# EAGLE board design (EAGLE 7.6.0)
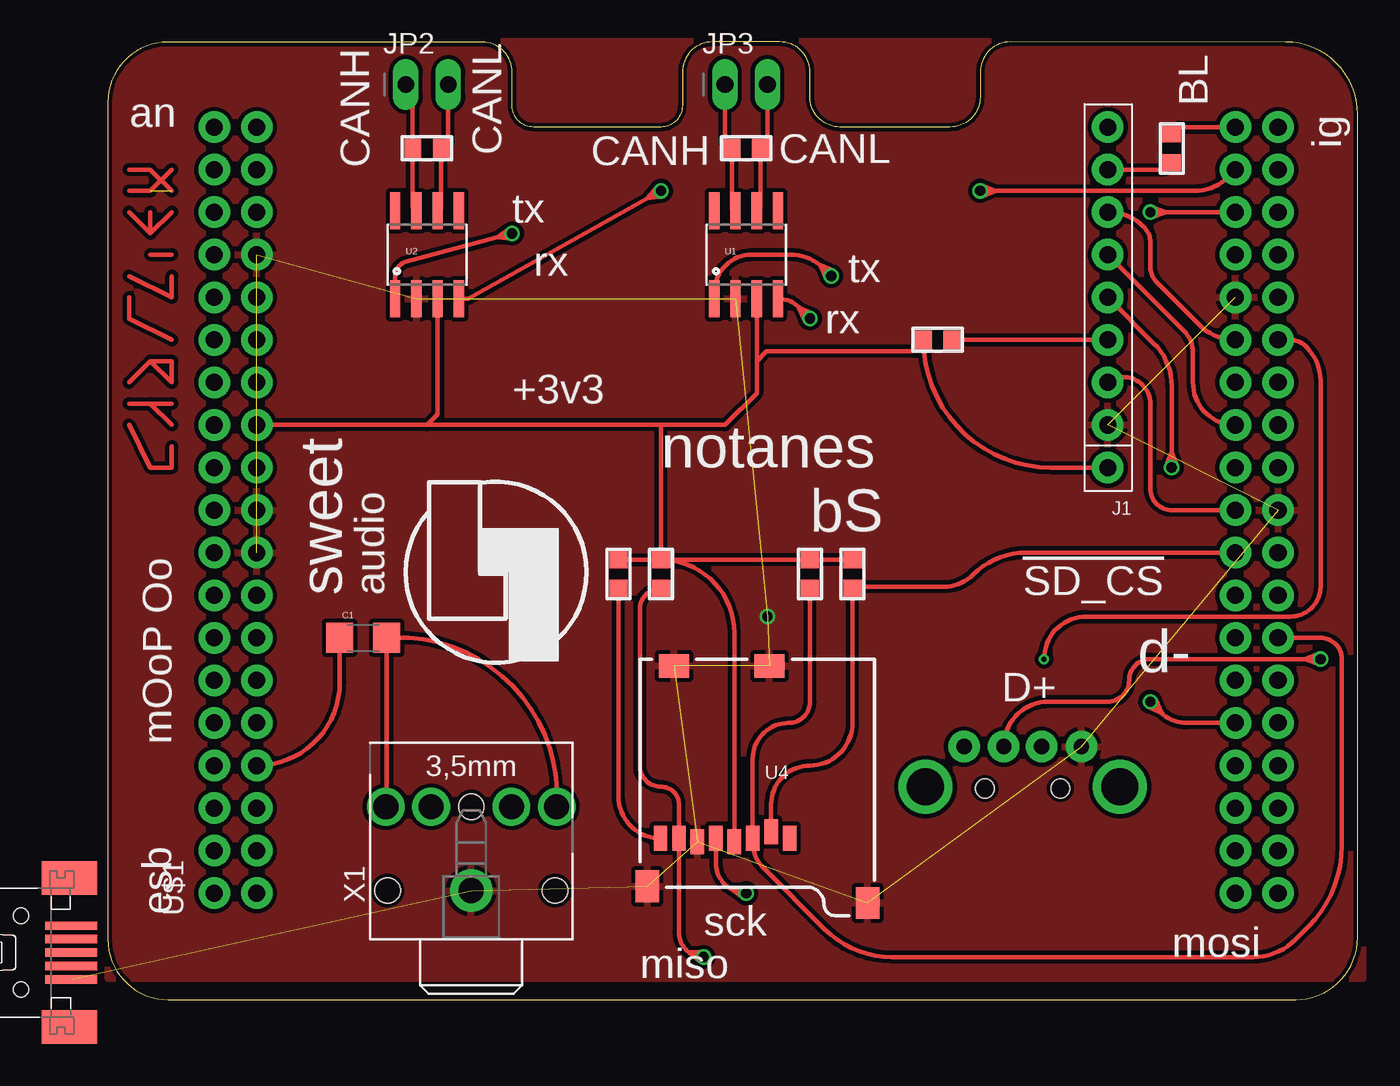
[diagram p0: board, top side]
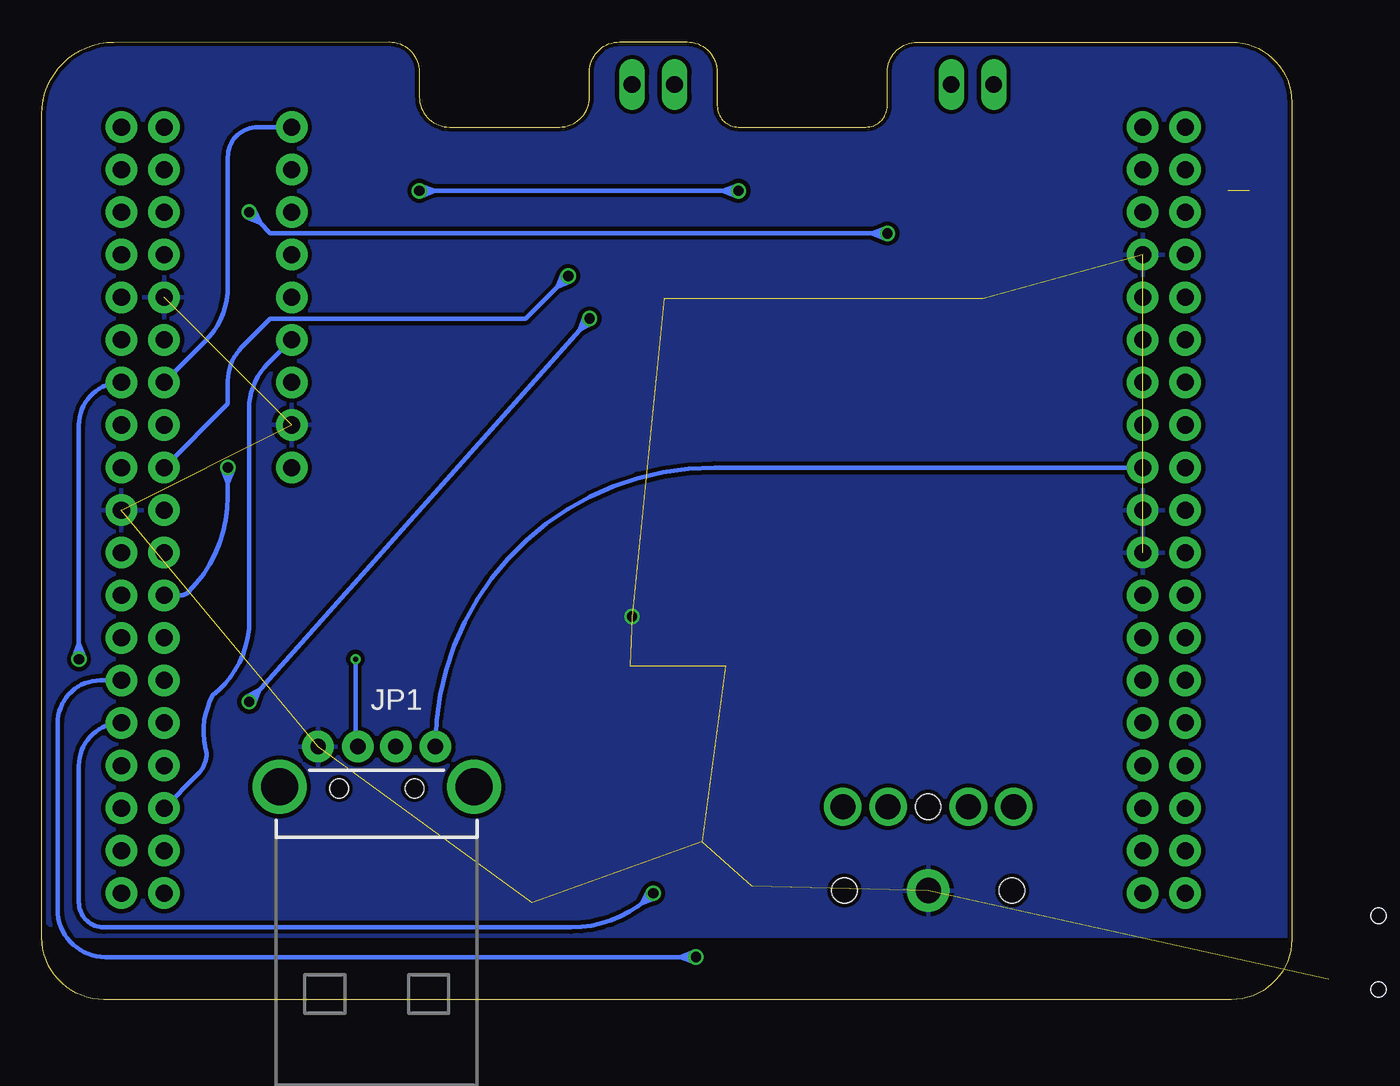
[diagram p1: board, bottom side, seen from below]

Size 74.6 x 57.15 mm. Coordinates in mm from the lower left corner, seen from the top.
Outline: 22.34,57.14 3.58,57.14 arc90 0,53.55 0,3.59 arc90 3.59,0 70.9,0 arc90 74.6,3.7 74.6,52.84 arc90 70.3,57.14 53.87,57.15 arc90 52.07,55.35 52.07,53.87 arc-90 50.27,52.07 43.71,52.07 arc-90 41.91,53.87 41.91,55.35 arc90 40.11,57.15 36.09,57.15 arc90 34.29,55.35 34.29,53.34 arc-90 33.02,52.07 25.4,52.07 arc-90 24.13,53.34 24.13,55.35 arc90 22.34,57.14
Copper layers (1*16): Top 0.035mm / dielectric 1.5mm / Bottom 0.035mm
Design rules "ITEADstudio_DRC": minimum track width 6mil, minimum drill 12mil, track to track 6mil, track to pad 6mil, pad to pad 6mil, via to via 6mil, smd to smd 0mil, copper to edge 10mil, drill to drill 10mil, minimum pad ring 10mil, minimum via ring 6mil, stop-mask expansion 2mil, vias tented up to drill 100mil, thermal gap 10mil
Net classes: 0 default: width 0.254 mm; 2 power: width 0.279 mm, drill 0.254 mm

## Footprints (pad centres in the part's own frame; a part is rotated, then mirrored left to right if it is on the bottom)
1206 = smd 1.6 x 1.8: 1 -1.4,0; 2 1.4,0
SPI_DISPLAY = drill 1.016 pad 1.88: CS -5.08,3.81; D/C -5.08,-1.27; GND -5.08,6.35; LED -5.08,-8.89; MISO -5.08,-11.43; MOSI -5.08,-3.81; RESET -5.08,1.27; SCK -5.08,-6.35; VCC -5.08,8.89
USB-A-H = drill 0.914 pad 1.88: D+ 2.4,1.127; D- 2.4,-1.127; GND 2.4,3.5; VBUS 2.4,-3.5 | drill 2.2: GND2 0,-5.8; GND3 0,5.8 | hole 1.1: -0.1,2.25; -0.1,-2.25
1X02_OVAL = drill 1 long: 1 -1.27,0; 2 1.27,0
RLC_0603@1 = smd 1 x 1.1: 1 -0.85,0; 2 0.85,0
SO08 = smd 0.61 x 2.21: 1 -1.905,-2.616; 2 -0.635,-2.616; 3 0.635,-2.616; 4 1.905,-2.616; 5 1.905,2.616; 6 0.635,2.616; 7 -0.635,2.616; 8 -1.905,2.616
MICRO-SD-SOCKET-PP = smd 0.8 x 1.5: 1 -8.94,10.7; 2 -7.84,10.3; 3 -6.74,10.7; 4 -5.64,10.9; 5 -4.54,10.7; 6 -3.44,10.9; 7 -2.34,10.7; 8 -1.24,10.7 | smd 1.8 x 1.4: CD1 -2.05,0.4; CD2 -7.75,0.4 | smd 1.4 x 1.9: GND1 -13.6,14.55; GND3 -0.45,13.55
MOPHO = drill 1.016 pad 1.88: P$1 2.54,48.26; P$2 5.08,48.26; P$3 2.54,45.72; P$4 5.08,45.72; P$5 2.54,43.18; P$6 5.08,43.18; P$7 2.54,40.64; P$8 5.08,40.64; P$9 2.54,38.1; P$10 5.08,38.1; P$11 2.54,35.56; P$12 5.08,35.56; P$13 2.54,33.02; P$14 5.08,33.02; P$15 2.54,30.48; P$16 5.08,30.48; P$17 2.54,27.94; P$18 5.08,27.94; P$19 2.54,25.4; P$20 5.08,25.4; P$21 2.54,22.86; P$22 5.08,22.86; P$23 2.54,20.32; P$24 5.08,20.32; P$25 2.54,17.78; P$26 5.08,17.78; P$27 2.54,15.24; P$28 5.08,15.24; P$29 2.54,12.7; P$30 5.08,12.7; P$31 2.54,10.16; P$32 5.08,10.16; P$33 2.54,7.62; P$34 5.08,7.62; P$35 2.54,5.08; P$36 5.08,5.08; P$37 2.54,2.54; P$38 5.08,2.54; P$39 63.5,48.26; P$40 66.04,48.26; P$41 63.5,45.72; P$42 66.04,45.72; P$43 63.5,43.18; P$44 66.04,43.18; P$45 63.5,40.64; P$46 66.04,40.64; P$47 63.5,38.1; P$48 66.04,38.1; P$49 63.5,35.56; P$50 66.04,35.56; P$51 63.5,33.02; P$52 66.04,33.02; P$53 63.5,30.48; P$54 66.04,30.48; P$55 63.5,27.94; P$56 66.04,27.94; P$57 63.5,25.4; P$58 66.04,25.4; P$59 63.5,22.86; P$60 66.04,22.86; P$61 63.5,20.32; P$62 66.04,20.32; P$63 63.5,17.78; P$64 66.04,17.78; P$65 63.5,15.24; P$66 66.04,15.24; P$67 63.5,12.7; P$68 66.04,12.7; P$69 63.5,10.16; P$70 66.04,10.16; P$71 63.5,7.62; P$72 66.04,7.62; P$73 63.5,5.08; P$74 66.04,5.08; P$75 63.5,2.54; P$76 66.04,2.54
STX3100 = drill 1.5 pad 2.54: 1 2.7,-0.1 | drill 1.5: 2 7.7,5; 3 7.7,2.3; 4 7.7,-2.5; 5 7.7,-5.2 | hole 1.5: 2.7,4.9; 2.7,-5.1; 7.7,-0.1
32005-301 = smd 3.1 x 0.5: 1 3,1.6; 2 3,0.8; 3 3,0; 4 3,-0.8; 5 3,-1.6 | smd 2.5 x 2: M1 -3,-4.45; M2 -3,4.45 | smd 3.3 x 2: M3 2.9,4.45; M4 2.9,-4.45 | hole 0.9: 0,2.2; 0,-2.2

## Placement (x,y rotation side)
C1  [1206]  15.24,21.59 0 top
J1  SPI_TFT_DISPLAY  [SPI_DISPLAY]  54.61,40.64 180 top
JP1  USB-A-H  [USB-A-H]  54.61,12.7 90 bottom
JP2  [1X02_OVAL]  19.05,54.61 0 top
JP3  [1X02_OVAL]  38.1,54.61 0 top
R1  100  [RLC_0603@1]  63.5,50.8 90 top
R2  10K  [RLC_0603@1]  49.53,39.37 180 top
R3  120  [RLC_0603@1]  19.05,50.8 180 top
R4  120  [RLC_0603@1]  38.1,50.8 180 top
R61  10K  [RLC_0603@1]  30.48,25.4 90 top
R62  10K  [RLC_0603@1]  33.02,25.4 90 top
R63  10K  [RLC_0603@1]  41.91,25.4 90 top
R64  10K  [RLC_0603@1]  44.45,25.4 90 top
U1  MCP2551  [SO08]  38.1,44.45 0 top
U2  MCP2551  [SO08]  19.05,44.45 0 top
U4  SDCARD  [MICRO-SD-SOCKET-PP]  31.75,20.32 180 top
U$1  MOPHOMOPHO_466RE  [MOPHO]  3.81,3.81 0 top
X1  STEREOJACK  [STX3100]  21.59,3.81 90 top
X2  MINI-USB-32005-301  [32005-301]  -5.19,2.81 0 top

## Library data of the parts
C1 U1 U2 = SparkFun
J1 = kanflo
JP1 = SparkFun-Connectors
JP2 JP3 = microbuilder
R1-R4 R61-R64 = STM32-PROX; DIGIKEY: RMCF0603JT10K0CT-ND; MPN: RMCF0603JT10K0; OC_NEWARK: unknown; PARTNO: RMCF0603JT10K0
U4 = STM32-PROX; OC_NEWARK: unknown; PARTNO: *
U$1 = mopho
X1 = adafruit
X2 = con-cypressindustries; OC_FARNELL: unknown; OC_NEWARK: unknown

## Nets
!SD_CS/JTAG_TDI: R64.1 U4.2 U$1.P$59
+3V3: J1.VCC R2.2 R61.2 R62.2 R63.2 R64.2 U1.3 U2.3 U4.4 U$1.P$16
AUDIO_OUT: C1.2 X1.2 X1.5
AVDD: U$1.P$45
CAN1_RX: U2.4 U$1.P$41
CAN1_TX: U2.1 U$1.P$43
CAN2_RX: U1.4 U$1.P$67
CAN2_TX: U1.1 U$1.P$55
CANH1: JP2.1 R3.2 U2.7
CANH2: JP3.1 R4.2 U1.7
CANL1: JP2.2 R3.1 U2.6
CANL2: JP3.2 R4.1 U1.6
D+: JP1.D+ U$1.P$50
D-: JP1.D- U$1.P$52
GND: J1.GND JP1.GND U1.2 U2.2 U4.6 U4.CD1 U4.CD2 U4.GND1 U4.GND3 U$1.P$8 U$1.P$20 U$1.P$22 U$1.P$47 U$1.P$58 X1.1 X2.5
HOST_D+: X2.3
HOST_D-: X2.2
N$1: C1.1 U$1.P$32
N$8: J1.LED R1.1
N$13: X2.1
SD_MISO: R62.1 U4.7 U$1.P$66
SD_MOSI: R63.1 U4.3 U$1.P$64
SD_RSV: R61.1 U4.8
SD_SCK/TDO: U4.5 U$1.P$68
TFT_CS: J1.CS U$1.P$57
TFT_DC: J1.D/C U$1.P$61
TFT_LCD: R1.2 U$1.P$39
TFT_MISO: J1.MISO U$1.P$51
TFT_MOSI: J1.MOSI U$1.P$53
TFT_RESET: J1.RESET R2.1 U$1.P$71
TFT_SCK: J1.SCK U$1.P$49
USB_ID: X2.4
VBAT: U$1.P$33
VCC: JP1.VBUS U$1.P$18
VDD: U$1.P$5
VIN: U$1.P$24

## Tracks (layer width: path | path; a pad name or v marks a point on that pad's centre or on a via)
!SD_CS/JTAG_TDI
  Top 0.254: U4.2 39.59,11.65 arc-90 41.91,13.97 arc90 44.45,16.51 R64.1 44.54,24.64 49.91,24.64 arc45 51.65,25.36 arc-45 54.81,26.67 U$1.P$59
+3V3
  Top 0.254: R64.2 R63.2 33.44,26.25 arc-90 33.02,26.67 | J1.VCC 56.3,31.75 arc-90 R2.2 48,38.69 39.32,38.69 38.73,38.1 | 13.55,34.29 U$1.P$16 19.05,34.29 | 33.02,34.29 36.83,34.29 38.73,36.2 38.73,38.1 | 33.02,34.29 19.05,34.29 | U2.3 19.68,34.92 19.05,34.29 | U1.3 38.73,38.1 | R61.2 R62.2 | R62.2 33.02,26.67 | 33.02,26.67 33.02,34.29 | U4.4 37.39,21.88 arc90 R62.2
AUDIO_OUT
  Top 0.254: X1.2 16.64,11.56 C1.2 17.98,21.59 arc-90 X1.5
CAN1_RX  (via drill 0.61)
  Top 0.254: U2.4 21.51,41.83 32.22,47.81 | 32.22,47.81 v33.02,48.26 | v52.07,48.26 52.98,48.26 | 52.98,48.26 64.86,48.26 arc45 66.87,49.09 U$1.P$41 | 32.22,47.81 33.07,47.93 v33.02,48.26 | 32.22,47.81 32.77,48.47 v33.02,48.26 | 52.98,48.26 52.19,48.57 v52.07,48.26 | 52.98,48.26 52.19,47.95 v52.07,48.26
  Bottom 0.254: v33.02,48.26 33.93,48.26 | 33.93,48.26 51.16,48.26 | 51.16,48.26 v52.07,48.26 | 33.93,48.26 33.14,48.57 v33.02,48.26 | 33.93,48.26 33.14,47.95 v33.02,48.26 | 51.16,48.26 51.95,47.95 v52.07,48.26 | 51.16,48.26 51.95,48.57 v52.07,48.26
CAN1_TX  (via drill 0.61)
  Top 0.254: U2.1 17.14,43.17 arc-72 17.76,44.02 v24.13,45.72 | v62.23,46.99 63.14,46.99 | 63.14,46.99 U$1.P$43 | v24.13,45.72 24.09,45.39 23.25,45.48 23.93,45.99 v24.13,45.72 | 63.14,46.99 62.35,47.3 v62.23,46.99 | 63.14,46.99 62.35,46.68 v62.23,46.99
  Bottom 0.254: v24.13,45.72 25.04,45.72 | 25.04,45.72 60.96,45.72 61.58,46.34 | 61.58,46.34 v62.23,46.99 | 25.04,45.72 24.25,46.03 v24.13,45.72 | 25.04,45.72 24.25,45.41 v24.13,45.72 | 61.58,46.34 62.36,46.69 v62.23,46.99 | 61.58,46.34 61.93,47.12 v62.23,46.99
CAN2_RX  (via drill 0.61)
  Top 0.254: U$1.P$67 64.38,16.51 arc-45 62.88,17.13 | 62.88,17.13 v62.23,17.78 | v41.91,40.64 41.26,41.29 | 41.26,41.29 41.22,41.33 arc45 U1.4 | 62.88,17.13 62.53,17.91 v62.23,17.78 | 62.88,17.13 62.1,17.48 v62.23,17.78 | 41.26,41.29 41.61,40.51 v41.91,40.64 | 41.26,41.29 42.04,40.94 v41.91,40.64
  Bottom 0.254: v62.23,17.78 42.52,39.96 | 42.52,39.96 v41.91,40.64 | v62.23,17.78 61.92,17.66 61.62,18.46 62.38,18.07 v62.23,17.78 | 42.52,39.96 42.22,40.76 v41.91,40.64 | 42.52,39.96 41.76,40.35 v41.91,40.64
CAN2_TX  (via drill 0.61)
  Top 0.254: U1.1 36.21,42.29 arc-88 38.43,44.45 40.73,44.45 arc-39 42.52,43.82 | v43.18,43.18 42.74,43.62 arc6 42.52,43.82 | 42.52,43.82 42.88,43.04 v43.18,43.18 | 42.52,43.82 43.31,43.48 v43.18,43.18
  Bottom 0.254: U$1.P$55 63.5,35.56 63.5,36.92 arc45 62.67,38.93 60.96,40.64 45.72,40.64 43.83,42.53 | 43.83,42.53 v43.18,43.18 | 43.83,42.53 43.48,43.31 v43.18,43.18 | 43.83,42.53 43.05,42.88 v43.18,43.18
CANH1
  Top 0.254: JP2.1 arc-90 18.2,54.19 R3.2 18.2,47.28 arc90 U2.7
CANH2
  Top 0.254: JP3.1 36.83,51.22 arc90 R4.2 37.25,47.28 arc90 U1.7
CANL1
  Top 0.254: 20.32,55.88 JP2.2 20.32,51.22 arc-90 R3.1 19.9,47.28 arc-90 U2.6
CANL2
  Top 0.254: JP3.2 39.37,51.22 arc-90 R4.1 38.95,47.28 arc-90 U1.6
D+  (via drill 0.3)
  Top 0.254: U$1.P$50 70.59,39.37 arc-45 71.49,39 71.56,38.93 arc-45 72.39,36.92 72.39,24.66 arc-90 70.59,22.86 58.42,22.86 arc90 v55.88,20.32
  Bottom 0.254: JP1.D+ arc90 55.88,15.24 v55.88,20.32
D-  (via drill 0.61)
  Top 0.254: 71.48,20.32 62.23,20.32 arc90 60.96,19.05 arc-90 59.69,17.78 56.16,17.78 arc90 JP1.D- | 71.48,20.32 v72.39,20.32 | 71.48,20.32 72.27,20.01 v72.39,20.32 | 71.48,20.32 72.27,20.63 v72.39,20.32
  Bottom 0.254: v72.39,20.32 72.39,21.23 | 72.39,21.23 72.39,34.29 arc90 U$1.P$52 | 72.39,21.23 72.08,20.44 v72.39,20.32 | 72.39,21.23 72.7,20.44 v72.39,20.32
GND  (via drill 0.61)  (16 unrouted)
  other vias: 39.37,22.86
  pour Top (isolate 0.254): 70.35,57.15 3.59,57.15 arc90 0,53.56 0,1.27 74.93,1.27 74.93,52.57 arc90
  pour Bottom (isolate 0.254): 74.93,57.15 0,57.15 0,3.81 72.39,3.81 arc90 74.93,6.35
N$1
  Top 0.254: U$1.P$32 arc90 13.84,18.92 C1.1
N$2
  Top 0.254: 1.27,35.56 2.54,35.56 | 3.81,34.29 2.54,35.56 | 2.54,35.56 3.81,35.56
N$3
  Top 0.254: 2.54,38.1 3.81,38.1 3.81,36.83 2.54,38.1 | 2.54,38.1 1.27,36.83
N$4
  Top 0.254: 1.27,34.29 2.54,31.75 3.81,31.75 3.81,33.02
N$5
  Top 0.254: 3.81,39.37 1.27,40.64 1.27,41.91
N$6
  Top 0.254: 1.27,43.18 3.81,41.91 3.81,43.18
N$7
  Top 0.254: 2.54,44.45 3.81,44.45
N$8
  Top 0.254: J1.LED 63.08,49.53 arc90 R1.1
N$9
  Top 0.254: 2.54,45.72 3.81,46.99 | 2.54,45.72 1.27,46.99 | 2.54,45.72 2.54,46.99
N$10  (1 unrouted)
  Top 0.254: 1.27,48.26 2.54,48.26 3.81,49.53 | 3.81,48.26 2.54,49.53 1.27,49.53
SD_MISO  (via drill 0.61)
  Top 0.254: 34.69,2.82 arc-54 34.09,4.01 U4.7 34.09,11.63 arc90 33.02,12.7 arc-90 31.75,13.97 31.75,23.28 arc-90 R62.1 | 34.69,2.82 arc36 v35.56,2.54 | 34.69,2.82 35.35,2.28 v35.56,2.54 | 34.69,2.82 35.54,2.87 v35.56,2.54
  Bottom 0.254: U$1.P$66 71.12,19.05 arc-90 73.66,16.51 73.66,5.38 arc-90 70.82,2.54 36.47,2.54 | v35.56,2.54 36.47,2.54 | 36.47,2.54 35.68,2.85 v35.56,2.54 | 36.47,2.54 35.68,2.23 v35.56,2.54
SD_MOSI
  Top 0.254: U$1.P$64 72.39,21.59 arc-90 73.66,20.32 73.66,9.18 arc-45 71.66,4.35 70.9,3.59 arc-45 68.36,2.54 46.8,2.54 arc-45 42.79,4.2 39.13,7.86 arc-45 38.49,9.4 U4.3 38.49,14.36 arc-90 40.64,16.51 arc90 41.91,17.78 R63.1
SD_RSV
  Top 0.254: 32.68,9.31 U4.8 arc-90 30.48,12.13 R61.1
SD_SCK/TDO  (via drill 0.61)
  Top 0.254: U4.5 36.29,8.16 arc61 37.22,6.58 | 37.22,6.58 arc29 v38.1,6.35 | 37.22,6.58 37.91,6.08 v38.1,6.35 | 37.22,6.58 38.06,6.68 v38.1,6.35
  Bottom 0.254: v38.1,6.35 arc45 43.01,4.32 70.91,4.32 arc90 72.39,5.8 72.39,13.97 arc90 U$1.P$68 | v38.1,6.35 38.39,6.5 38.79,5.75 37.99,6.04 v38.1,6.35
TFT_CS
  Top 0.254: U$1.P$57 63.5,29.21 arc-90 62.23,30.48 62.23,35.56 arc127 J1.CS
TFT_DC  (via drill 0.61)
  Top 0.254: J1.D/C 62.45,39.15 arc-45 63.5,36.61 63.5,32.66 | 63.5,32.66 v63.5,31.75 | 63.5,32.66 63.19,31.87 v63.5,31.75 | 63.5,32.66 63.81,31.87 v63.5,31.75
  Bottom 0.254: v63.5,31.75 63.5,30.84 | 63.5,30.84 63.5,30 arc45 65.85,24.32 arc45 66.3,24.13 U$1.P$61 | 63.5,30.84 63.81,31.63 v63.5,31.75 | 63.5,30.84 63.19,31.63 v63.5,31.75
TFT_LCD
  Top 0.254: R1.2 63.92,52.07 U$1.P$39
TFT_MISO
  Bottom 0.254: U$1.P$51 64.84,39.3 arc-45 63.5,42.54 63.5,50.27 arc90 61.7,52.07 J1.MISO
TFT_MOSI
  Top 0.254: J1.MOSI 64.24,39.9 arc-45 64.77,38.63 64.77,36.83 arc90 U$1.P$53
TFT_RESET
  Top 0.254: R2.1 J1.RESET
  Bottom 0.254: J1.RESET 61.11,37.95 arc-45 62.23,35.25 62.23,22.12 arc45 64.4,18.15 arc-45 64.77,14.71 arc45 65.3,13.44 U$1.P$71
TFT_SCK
  Top 0.254: J1.SCK 59.78,46.99 arc-45 61.79,46.16 61.86,46.09 arc-45 62.23,45.19 62.23,43.71 arc45 62.6,42.81 65.14,40.27 arc45 U$1.P$49
VCC
  Bottom 0.254: JP1.VBUS arc90 34.46,31.75 U$1.P$18

## Text on the board
tPlace: CANH | BL | an | CANH | CANL | CANL | ig | tx | rx | tx | rx | +3v3 | notanes | bS | sweet | audio | !SD_CS | d- | D+ | mOoP Oo | esb | sck | mosi | miso
Reference: 10 cm | 10 cm